# Altium PCB BaseBoard.PcbDoc
Units mm, origin at the board's own origin, x right, y up, seen from the top; angles counter-clockwise.
Board outline 152.4 x 101.6 mm, 2 copper layers (Top Layer, Bottom Layer); 17 components, 12 nets, 68 pads, 26 vias.
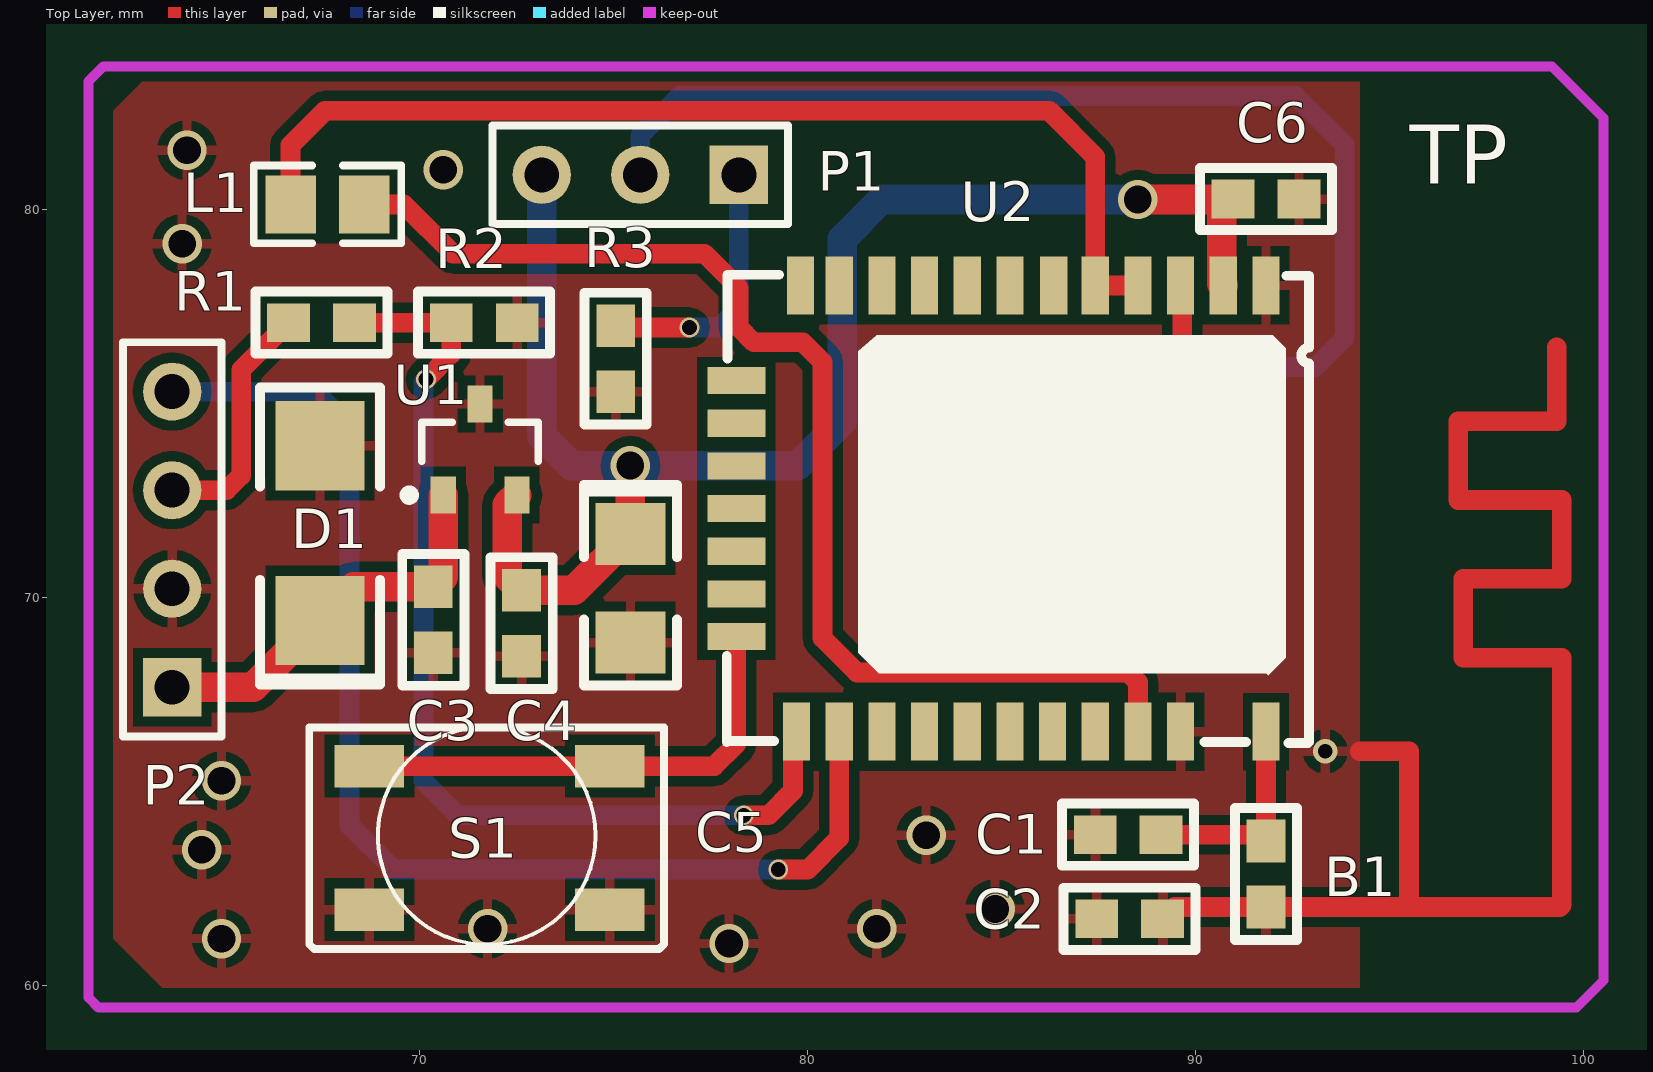
[diagram p0: Top Layer view]
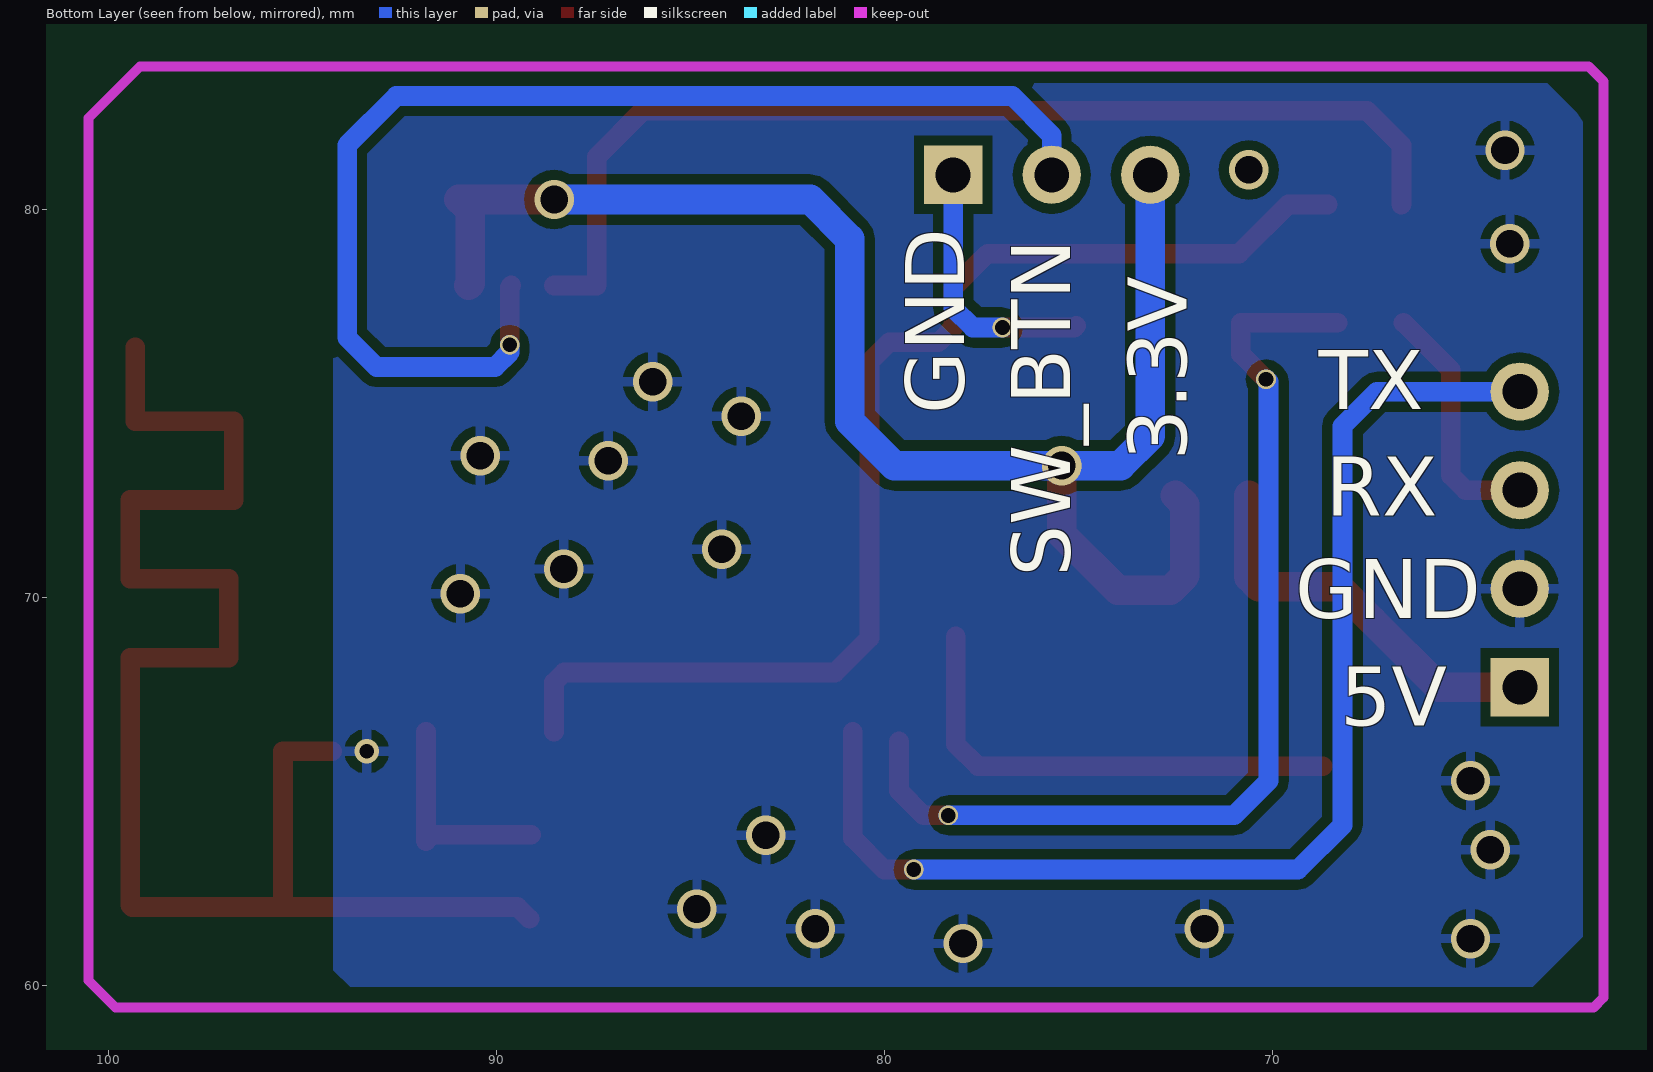
[diagram p1: Bottom Layer view, seen from below]

## Layer stack, top to bottom
Top Solder: solder mask 0.0102, Solder Resist, Dk 3.5
Top Layer: signal copper 0.0356
Dielectric 1: dielectric 0.32, FR-4, Dk 4.8
Bottom Layer: signal copper 0.0356
Bottom Solder: solder mask 0.0102, Solder Resist, Dk 3.5

## Board outline
25.4,25.4 177.8,25.4 177.8,127 25.4,127

## Design rules (kind name [scope] priority, off if disabled: settings)
Clearance [All] p1: gap=0.254
PolygonConnect [All] p1: connectstyle=Relief reliefconductorwidth=0.254 reliefentries=4 polygonreliefangle="90 Angle" airgapwidth=0.254
RoutingVias [All] p1: holewidth=0.381 width=0.508 viastyle="Through Hole" minholewidth=0.381 minwidth=0.508 maxholewidth=0.711 maxwidth=1.016
SolderMaskExpansion [All] p1: expansion=0.102
Width [All] p1: maxlimit=1.016 minlimit=0.254 preferedwidth=0.508
30 further rules are at their usual default settings.

## Components (designator, comment, footprint, x,y, rotation, side; value= is the part's Value field where it differs from the comment)
B1 "1nh" 0603 91.809,62.877 r270 top
C1 "15pf" 0603 88.265,63.881 r0 top
C2 "15pF" 0603 88.304,61.712 r0 top
C3 "1uF" 0603 70.368,69.43 r90 top
C4 "1uF" 0603 72.644,69.342 r90 top
C5 "10uF/16V" 1206 75.438,70.231 r270 top
C6 "0.1uF" 0603 91.821,80.264 r0 top
D1 "Schottky" DO214-AC 67.437,71.664 r270 top
L1 "LED" 0805 67.63,80.137 r0 top
P1 "HC-SR501" Header3 75.692,78.629 r180 top
P2 "Header 4" HDR1X4 63.627,67.691 r90 top
R1 "2.2K" 0603 67.476,77.079 r0 top
R2 "4.7K" 0603 71.667,77.099 r180 top
R3 "2.2K" 0603 75.067,76.161 r90 top
S1 "Button" BUtton-T4 74.907,61.959 r180 top
U1 "AP7313" AP7313-33SAG-7 71.562,73.819 r90 top
U2 "BM78SPP05NC2" BM78SPP05NC2 77.919,78.298 r270 top

## Footprints (in the part's own frame and the unit in brackets; to place one, negate y for a bottom-side part, rotate by r counter-clockwise, add the part's x,y. Pads: shape width x height; smd on the part's side, far side on the other; paste and mask are expansions set on the pad)
0603 [mm]
  rect 1.1x1 smd: 1(-0.85,0.01) 2(0.85,0.01)
  silkscreen extent -1.7,-0.79 1.7,0.81
0805 [mm]
  rect 1.3x1.5 smd: 1(-0.95,0) 2(0.95,0)
  silkscreen extent -1.9,-1 1.9,1
1206 [mm]
  rect 1.6x1.8 smd: 1(-1.41,0) 2(1.39,0)
  silkscreen extent -2.68,-1.2 2.49,1.2
AP7313-33SAG-7 [mm] "SOT23, 3-Leads, Body 2.90x2.40mm, Pitch 0.95mm, IPC Medium Density"
  rect 0.95x0.65 smd: 1(-1.175,0.95) 2(-1.175,-0.95) 3(1.175,0)
  silkscreen extent -1.3,-1.5 0.7,1.95
BM78SPP05NC2 [mm]
  rect 1.5x0.7 smd: 1(0.25,13.9) 2(0.25,12.8) 3(0.25,11.7) 4(0.25,10.6) 5(0.25,9.5) 6(0.25,8.43) 7(0.25,7.3) 8(0.25,6.2) 9(0.25,5.1) 10(0.25,4) 11(0.25,2.9) 12(0.25,1.9) 20(11.75,1.8) 21(11.75,2.9) 22(11.75,4) 23(11.75,5.1) 24(11.75,6.2) 25(11.75,7.3) 26(11.75,8.4) 27(11.75,9.5) 28(11.75,10.6) 29(11.75,11.7) 30(11.75,13.9)
  rect 0.7x1.5 smd: 13(2.7,0.25) 14(3.8,0.25) 15(4.9,0.25) 16(6,0.25) 17(7.1,0.25) 18(8.2,0.25) 19(9.3,0.25)
  silkscreen extent -0.03,0 12.04,15.01
BUtton-T4 [mm] "4*4*1.5"
  rect 1.8x1.1 smd: 1(0,0) 1(6.2,0) 2(0,-3.7) 2(6.2,-3.7)
  silkscreen extent -1.4,-4.71 7.75,1.02
DO214-AC [mm]
  rect 2.3x2.3 smd: 1(-2.25,0) 2(2.25,0)
  silkscreen extent -3.75,-1.55 3.9,1.55
HDR1X4 [mm] "Connector; Header; 4 Position"
  rect 1.5x1.5 hole 0.9: 1(0,0)
  round 1.5 hole 0.9: 2(2.54,0) 3(5.08,0) 4(7.62,0)
  silkscreen extent -1.27,-1.27 8.89,1.27
Header3 [mm]
  rect 1.5x1.5 hole 0.9: 1(-2.54,-2.27)
  round 1.5 hole 0.9: 2(0,-2.27) 3(2.54,-2.27)
  silkscreen extent -3.81,-3.54 3.81,-1

## Part data
B1: library part Bead
C1 C2 C3 C4 C6: library part Cap1, "ceramic"
C5: library part Cap3, "aluminum"
D1: library part B340A-13-F
P1: library part "Header 3", "Header, 3-Pin"
P2: "Header, 4-Pin"
R1 R2 R3: library part Res
U1: library part AP7313-33SAG-7

## Via types
v1: diameter 1.016, hole 0.711, Top Layer to Bottom Layer, 20 vias
v2: diameter 0.508, hole 0.381, Top Layer to Bottom Layer, 5 vias
v3: diameter 0.635, hole 0.381, Top Layer to Bottom Layer, 1 vias

## Nets (pads, with @x,y where several pads share a name; then routed paths per layer and width w, separated by ;. In a path a pad name is that pad's centre, name@x,y a point inside that pad or via, vN(x,y) a via of type N, cw(c..) or ccw(c..) an arc to the next point about the centre after c; other vN are vias at no path point)
3.3V: C4.2 C5.1 C6.1 P1.3 U1.2 U2.2 | length 40.7
  Top Layer w0.762: U1.2 72.263,72.395 72.263,70.563 C4.2 73.989,70.192 C5.1 v1(75.438,73.406) ; v1(88.519,80.264) C6.1@90.961,80.264 ; U2.2 90.678,78.089 90.678,79.981 C6.1@90.961,80.264 ; C6.1 C6.1@90.961,80.264
  Bottom Layer w0.762: P1.3 73.152,74.168 73.914,73.406 v1(75.438,73.406) 79.756,73.406 80.899,74.549 80.899,79.248 81.915,80.264 v1(88.519,80.264)
5V: C3.2 D1.2 P2.1 U1.1 | length 10.3
  Top Layer w0.762: P2.1 65.714,67.691 D1.2 68.303,70.28 C3.2 70.612,70.534 U1.1
ANT: B1.2 C1.1 C2.1 C2.2 C3.1 C4.1 C5.2 C6.2 D1.1 P2.2 R2.1 R3.1 S1.1 U1.3 U2.1 U2.29 | length 40.4
  Top Layer w0.508: C2.2 89.459,62.027 B1.2 95.504,62.027 ; 94.234,66.04 95.504,66.04 95.504,62.027 ; 99.314,76.454 99.314,74.549 96.774,74.549 96.774,72.517 99.441,72.517 99.441,70.485 96.901,70.485 96.901,68.453 99.441,68.453 99.441,62.078 99.39,62.027 95.504,62.027
  other v1: 77.978,61.087 64.897,61.214 71.755,61.468 81.788,61.468 84.836,61.976 64.389,63.5 83.058,63.881 64.897,65.278 90.932,70.104 88.265,70.739 84.201,71.247 87.122,73.533 90.424,73.66 83.693,74.676 85.979,75.565 63.881,79.121 64.008,81.534
  other v3: 93.345,66.04
LDO33_O: L1.1 U2.4 U2.5 | length 27.5
  Top Layer w0.508: L1.1 66.675,80.137 66.675,81.661 67.564,82.55 86.233,82.55 87.419,81.364 U2.5 U2.4
LED1: L1.2 U2.28 | length 31.1
  Top Layer w0.508: L1.2 69.596,80.137 70.866,78.867 77.343,78.867 78.232,77.978 78.232,76.962 78.613,76.581 79.883,76.581 80.391,76.073 80.391,68.961 81.28,68.072 88.265,68.072 88.519,67.818 U2.28
NetB1_1: B1.1 C1.2 U2.30 | length 5.6
  Top Layer w0.508: C1.2 91.655,63.891 B1.1 U2.30
NetP1_1: P1.1 R3.2 | length 6.8
  Top Layer w0.508: R3.2 75.106,76.962 v2(76.962,76.962)
  Bottom Layer w0.508: v2(76.962,76.962) 77.724,76.962 78.232,77.47 P1.1
NetR1_2: R1.2 R2.2 U2.20 | length 26
  Top Layer w0.508: R1.2 R2.2 70.817,76.278 v2(70.168,75.629) ; v2(78.359,64.389) 78.994,64.389 79.629,65.024 U2.20@79.629,66.294
  Bottom Layer w0.508: v2(70.168,75.629) 70.104,75.565 70.104,65.278 70.993,64.389 v2(78.359,64.389)
NetS1_2: S1.2 U2.19 | length 12.5
  Top Layer w0.508: S1.2@68.707,65.659 74.907,65.659 77.597,65.659 78.169,66.231 U2.19
RX: P2.3 R1.1 | length 6.4
  Top Layer w0.508: P2.3 65.024,72.771 65.405,73.152 65.405,75.868 R1.1
SW_BTN: P1.2 U2.3 | length 31.5
  Top Layer w0.508: U2.3 89.662,78.005 v2(89.662,76.517)
  Bottom Layer w0.508: P1.2 75.692,81.915 76.708,82.931 92.583,82.931 93.853,81.661 93.853,76.708 93.091,75.946 90.043,75.946 89.662,76.327 v2(89.662,76.517)
TX: P2.4 U2.21 | length 31.4
  Top Layer w0.508: v2(79.248,62.992) 80.01,62.992 80.819,63.801 U2.21
  Bottom Layer w0.508: P2.4 67.31,75.311 68.199,74.422 68.199,64.135 69.342,62.992 v2(79.248,62.992)
pads on no net: U2.6 U2.7 U2.8 U2.9 U2.10 U2.11 U2.12 U2.13 U2.14 U2.15 U2.16 U2.17 U2.18 U2.22 U2.23 U2.24 U2.25 U2.26 U2.27
copper on no net:
  other v1: 70.612,81.026

## Polygon pours and split planes (outlines as drawn)
ANT on Top Layer "GND" (solid, remove dead copper, pour order 0): 62.103,82.55 62.865,83.312 94.234,83.312 94.234,80.645 94.234,78.359 94.234,60.96 94.234,60.452 94.234,59.944 63.627,59.944 63.373,59.944 62.103,61.214 62.103,69.85
ANT on Bottom Layer "GND" (solid, remove dead copper, pour order 2): 62.154,82.499 62.916,83.261 94.005,83.261 94.209,83.058 94.209,60.477 94.209,60.401 93.777,59.969 63.297,59.969 62.052,61.214 62.001,61.265 62.001,81.94 62.001,82.271

## Keep-outs
Keep-Out Layer:
  lines w0.254: 61.468,59.69 61.468,65.564 61.468,77.565 61.468,83.312 61.849,83.693 99.187,83.693 99.949,82.931 100.52,82.359 100.52,74.612 100.52,60.134 99.822,59.436 61.722,59.436 61.468,59.69

## Silkscreen, mask and mechanical layers (free items; w line width, h text height)
Top Overlay:
  region: 81.305,76.352 81.788,76.759 81.864,76.759 91.999,76.759 92.329,76.429 92.329,68.453 91.872,67.996 91.821,68.047 81.839,68.047 81.305,68.58
  text "TP" at 95.529,80.67 h1.52
Bottom Overlay:
  text "TX" at 68.809,74.854 h1.52
  text "GND" at 77.953,74.727 h1.52 r270
  text "3.3V" at 72.212,73.533 h1.52 r270
  text "RX" at 68.631,72.111 h1.52
  text "SW_BTN" at 75.209,70.536 h1.52 r270
  text "GND" at 69.418,69.469 h1.52
  text "5V" at 68.25,66.7 h1.52
Top Paste:
  lines w0.5: 91.923,62.027 95.91,62.027 99.339,62.027 99.441,62.128 99.441,68.478 99.416,68.453 96.901,68.453 96.901,70.485 99.441,70.485 99.441,72.517 96.799,72.517 96.774,72.542 96.774,74.549 99.314,74.549 99.314,76.454
  lines w0.6: 94.513,66.065 95.479,66.065 95.504,66.04 95.504,62.027
Top Solder:
  lines w0.6: 91.821,62.052 99.416,62.052 99.441,62.078 99.441,68.478 99.416,68.453 96.926,68.453 96.901,68.478 96.901,70.51 99.466,70.51 99.441,70.536 99.441,72.517 99.39,72.568 96.749,72.568 96.774,72.593 96.774,74.549 99.365,74.549 99.314,74.6 99.314,76.429 ; 94.488,66.065 95.479,66.065 95.504,66.04 95.504,62.281